# Altium PCB PCB1.PcbDoc
Units mm, origin at the board's own origin, x right, y up, seen from the top; angles counter-clockwise.
Board outline 80.26 x 80.39 mm, 2 copper layers (Top Layer, Bottom Layer); 11 components, 7 nets, 40 pads, 0 vias.
Unrouted connection lines stored in the file: 1.
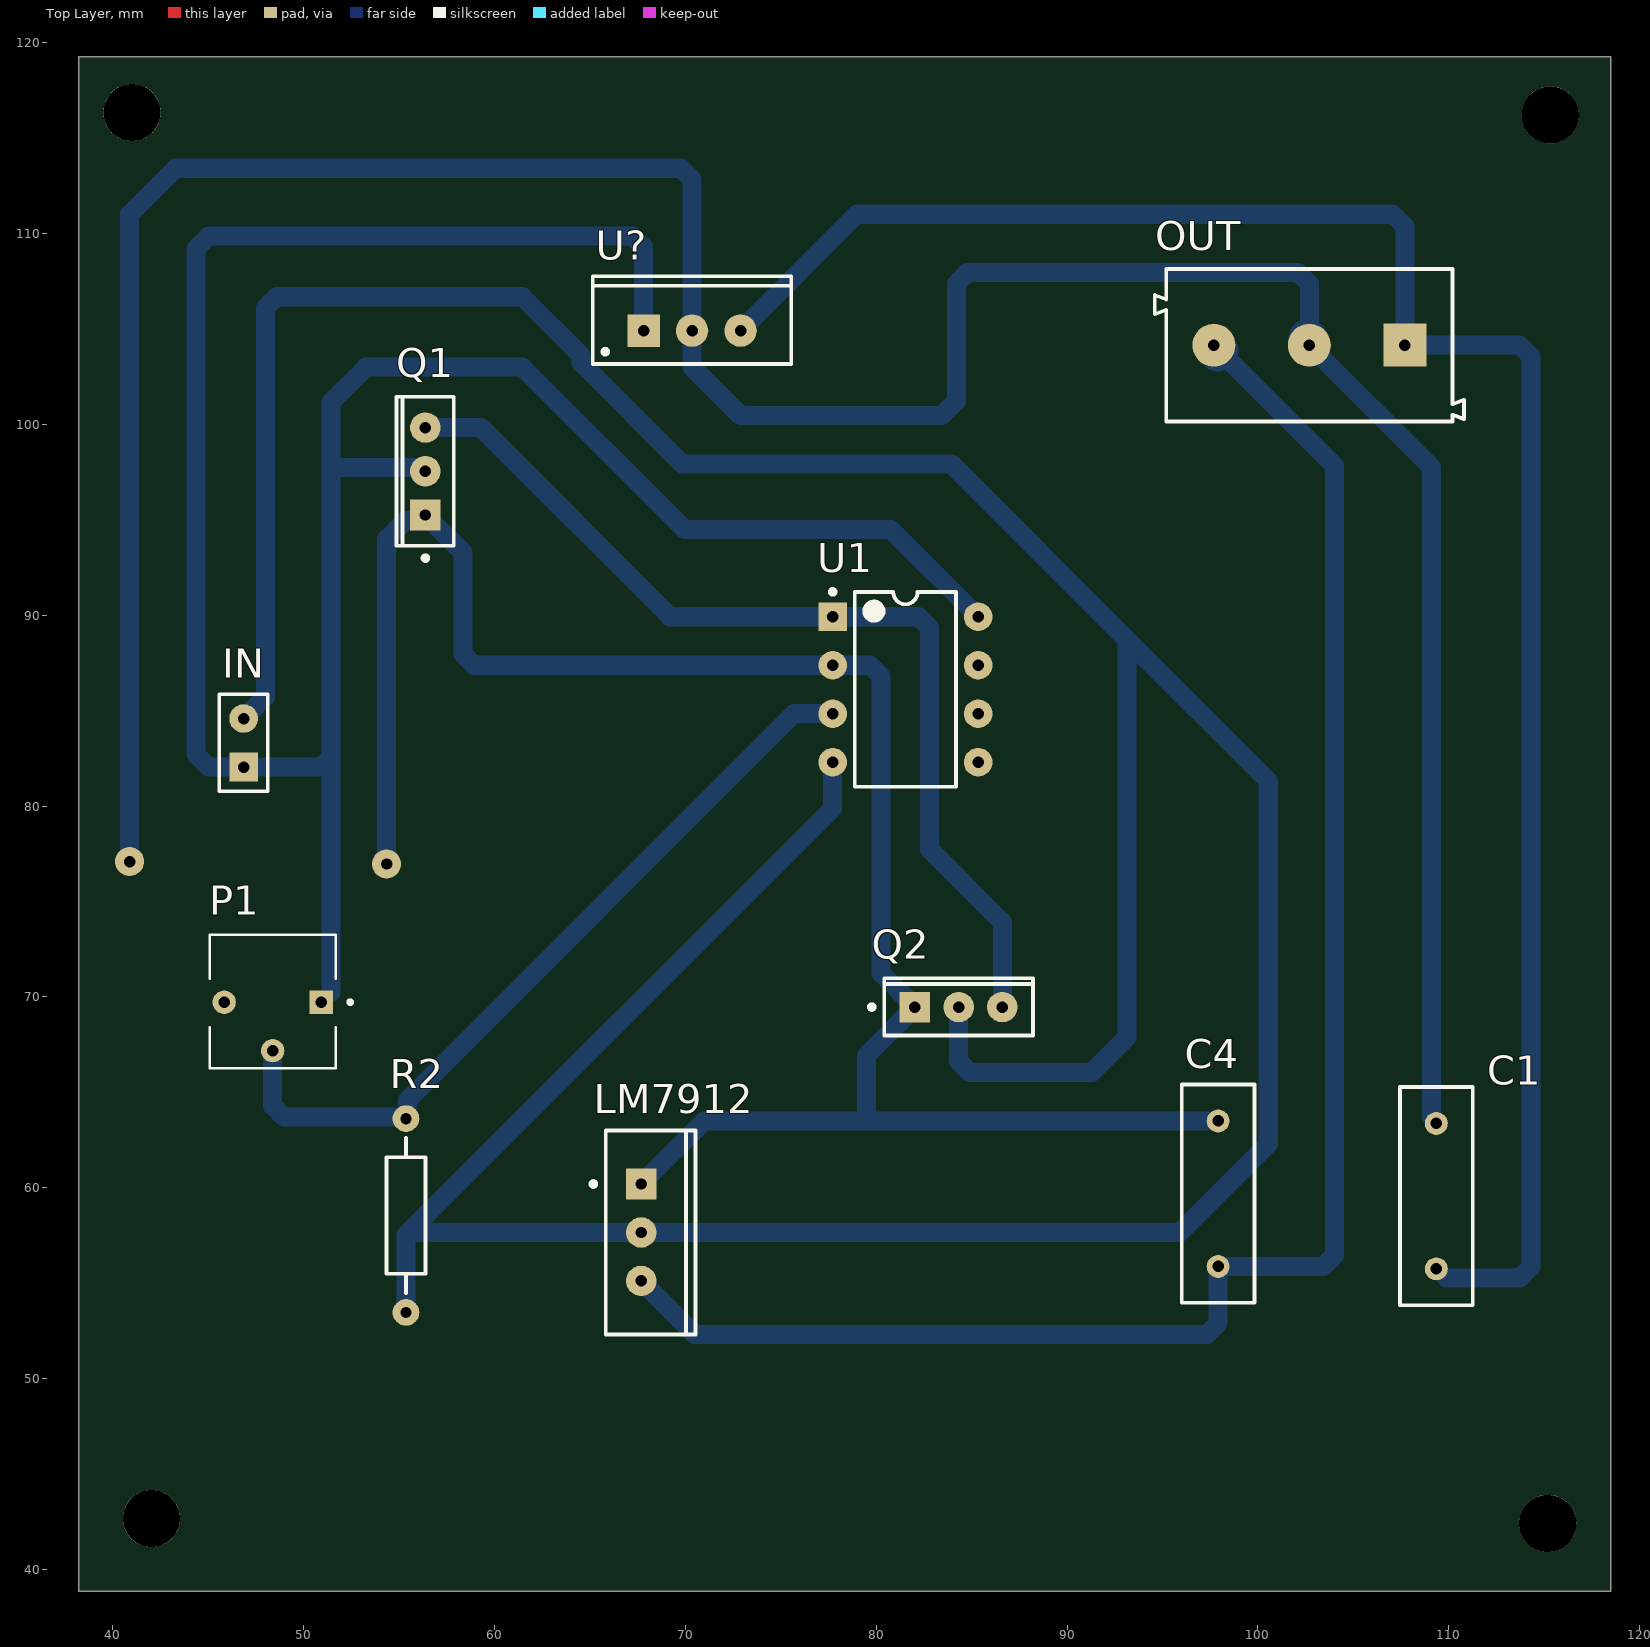
[diagram p0: Top Layer view]
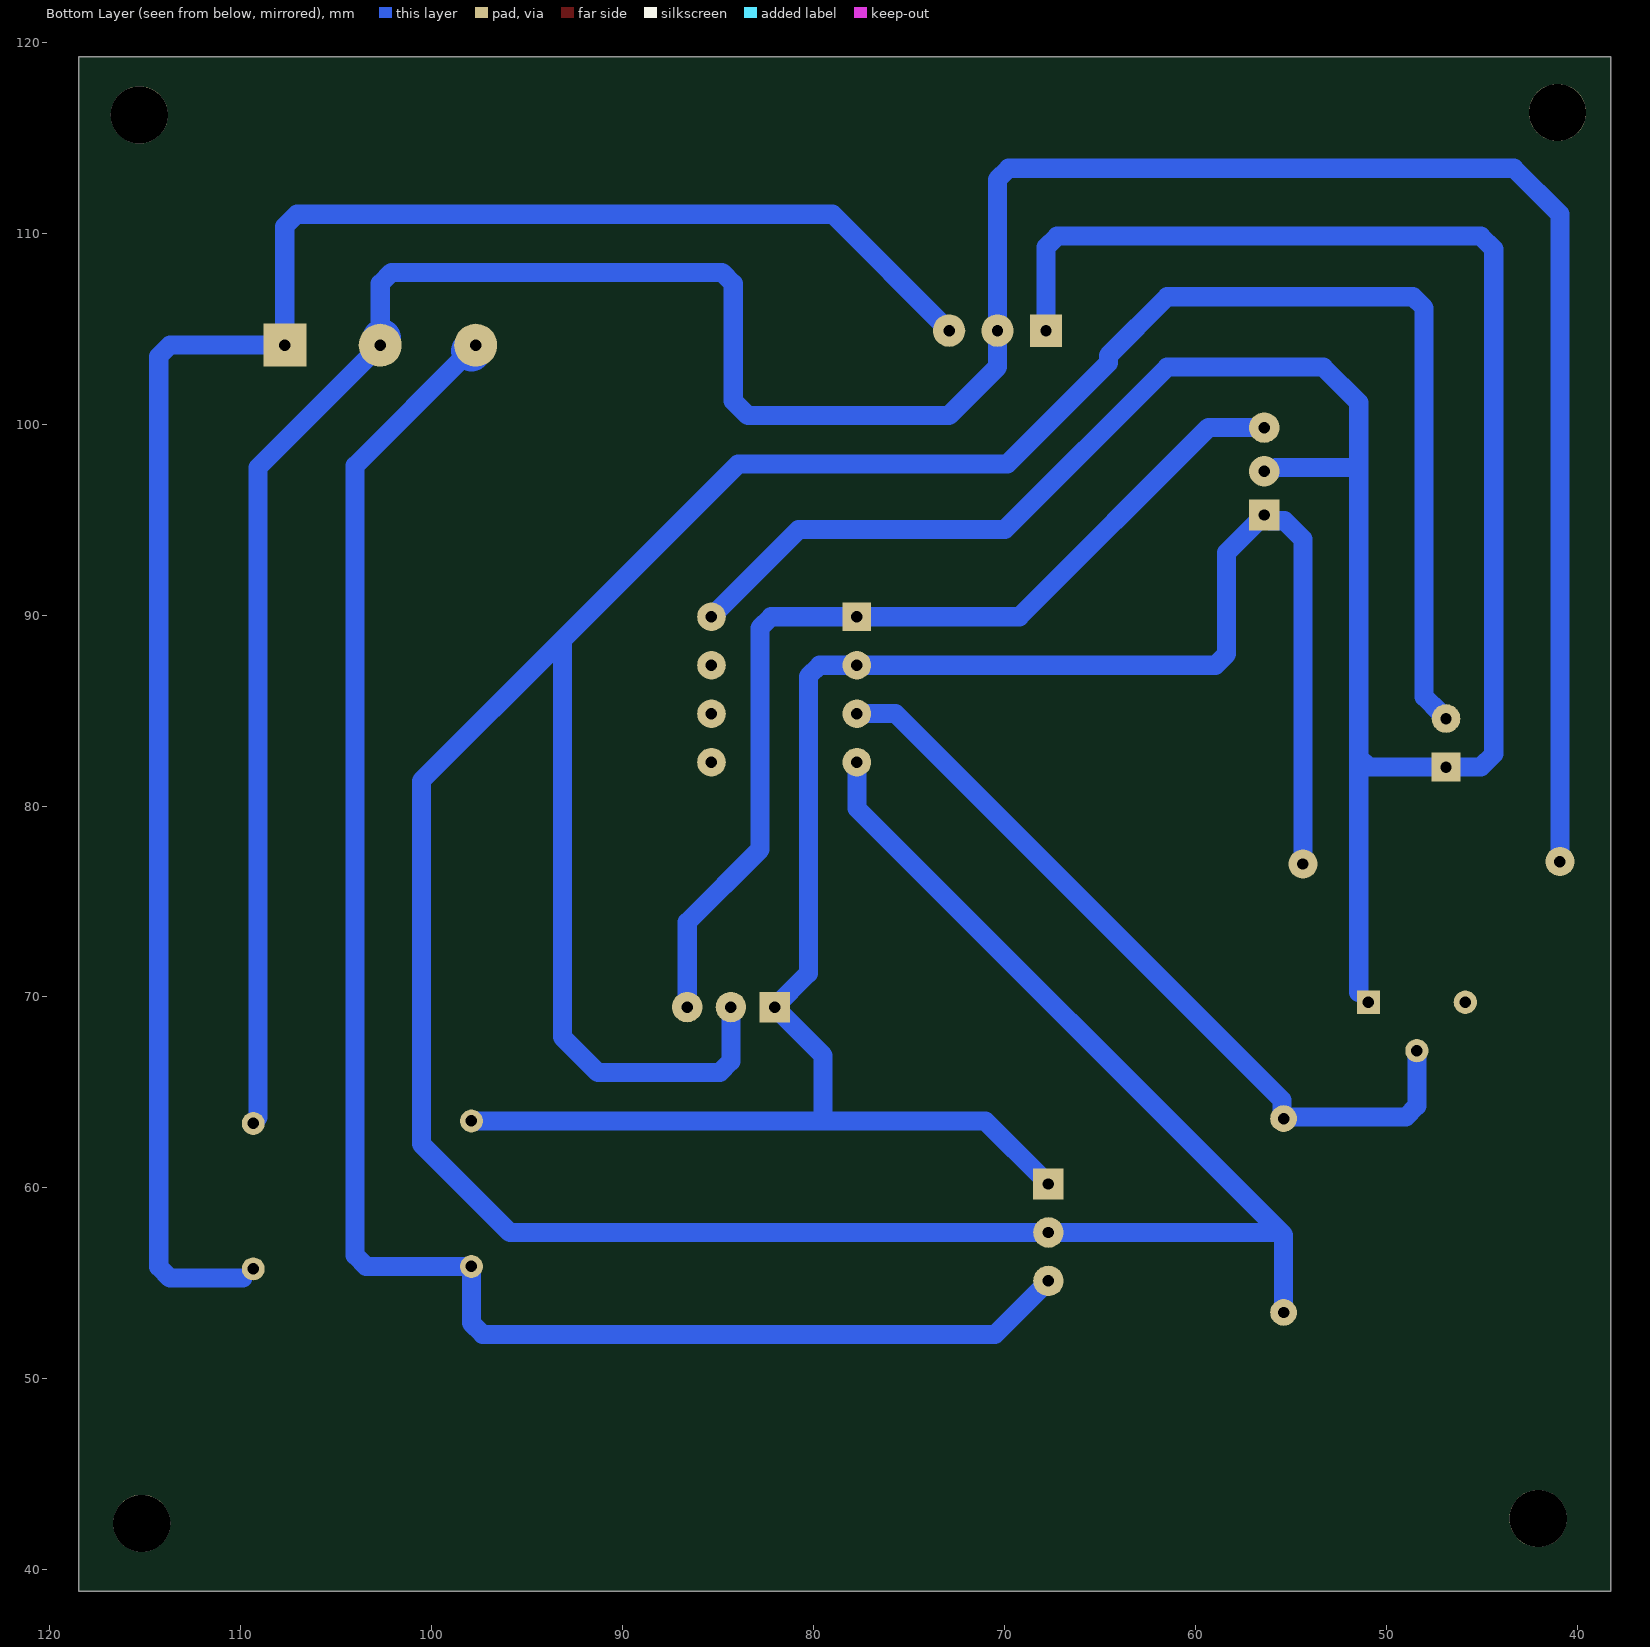
[diagram p1: Bottom Layer view, seen from below]

## Layer stack, top to bottom
Top Solder: solder mask 0.0102, Solder Resist, Dk 3.5
Top Layer: signal copper 0.0356
Dielectric 1: dielectric 0.32, FR-4, Dk 4.8
Bottom Layer: signal copper 0.0356
Bottom Solder: solder mask 0.0102, Solder Resist, Dk 3.5

## Board outline
38.227,38.862 118.491,38.862 118.491,119.253 38.227,119.253

## Design rules (kind name [scope] priority, off if disabled: settings)
Clearance [All] p1: gap=1 ignorepadtopadclearanceinfootprint=TRUE
PolygonConnect [All] p1: connectstyle=Relief reliefconductorwidth=0.254 reliefentries=4 polygonreliefangle="90 Angle" airgapwidth=0.254
RoomDefinition schemetic [InComponentClass('schemetic')] p1: confinementstyle=ConfineIn formatcopy=TRUE lockcomponents=FALSE outline 38.222,39.247 118.222,39.247 118.222,119.247 38.222,119.247
RoutingLayers [All] p1: top layer_v5=FALSE bottom layer_v5=TRUE
RoutingVias [All] p1: holewidth=0.711 width=1.27 viastyle="Through Hole" minholewidth=0.711 minwidth=1.27 maxholewidth=0.711 maxwidth=1.27
SolderMaskExpansion [All] p1: expansion=0.102 istentingtop=FALSE
Width [All] p1: maxlimit=2 minlimit=1 preferedwidth=2
29 further rules are at their usual default settings.

## Components (designator, comment, footprint, x,y, rotation, side; value= is the part's Value field where it differs from the comment)
C1 "Cap" RAD-0.3 109.347,59.563 r270 top value=1uF
C4 "Cap" RAD-0.3 97.917,59.69 r90 top value=1uF
IN "Header 2" HDR1X2 46.863,82.042 r90 top
LM7912 "LM7912CT" NDE0003A 67.691,57.658 r270 top
OUT "691111710003" 691111710003 102.696,104.14 r180 top
P1 "100k pot" TRIM_3362P-1-253LF 48.387,69.723 r180 top
Q1 "BD139" ONSC-TO-225-3-77-09 56.388,97.536 r180 top
Q2 "BD140" ONSC-TO-225-3-77-09 84.324,69.469 r90 top
R2 "100k" AXIAL-0.4 55.372,58.547 r90 top value=1K
U1 "TL072CP" P0008A 81.534,86.106 r0 top
U? "L78M12CV" TO220 70.358,104.902 r0 top

## Footprints (in the part's own frame and the unit in brackets; to place one, negate y for a bottom-side part, rotate by r counter-clockwise, add the part's x,y. Pads: shape width x height; smd on the part's side, far side on the other; paste and mask are expansions set on the pad)
691111710003 [mm] "5,00mm - modular - green - Horizontal entry with pressure clamp - 10,0mm height - 03p"
  rect 2.25x2.25 hole 0.6: 1(-5,0)
  round 2.25 hole 0.6: 2(0,0) 3(5,0)
  silkscreen extent -8.1,-4 8.1,4, body extent -8.1,-4 8.1,4, height 11.05
AXIAL-0.4 [mm] "Axial Device, Thru-Hole; 2 Leads; 0.4 in Pin Spacing"
  round 1.4 hole 0.6: 1(-5.08,0) 2(5.08,0)
  silkscreen extent -4.06,-1.02 4.06,1.02
HDR1X2 [mm] "Connector; Header; 2 Position"
  rect 1.5x1.5 hole 0.6: 1(0,0)
  round 1.5 hole 0.6: 2(2.54,0)
  silkscreen extent -1.27,-1.27 3.81,1.27
NDE0003A [mm] "FM, 3-Leads, Body 10.7x4.7mm, Pitch 2.54mm"
  rect 1.6x1.6 hole 0.6: 1(-2.54,0)
  round 1.6 hole 0.6: 2(0,0) 3(2.54,0)
  silkscreen extent -5.35,-2.62 5.35,2.85, body extent -5.4,-1.9 5.4,2.9, height 19.4
ONSC-TO-225-3-77-09 [mm] "FM, 3-Leads, Body 7.8x3mm, Pitch 2.29mm"
  rect 1.6x1.6 hole 0.6: 1(0,2.29)
  round 1.6 hole 0.6: 2(0,0) 3(0,-2.29)
  silkscreen extent -1.49,-3.9 1.51,4.67, body extent -1.49,-3.9 1.51,3.9, height 13.64
P0008A [mm] "DIP, 8-Leads, Body 10.15x6.6mm, Pitch 2.54mm"
  rect 1.5x1.5 hole 0.6: 1(-3.81,3.81)
  round 1.5 hole 0.6: 2(-3.81,1.27) 3(-3.81,-1.27) 4(-3.81,-3.81) 5(3.81,-3.81) 6(3.81,-1.27) 7(3.81,1.27) 8(3.81,3.81)
  silkscreen extent -3.93,-5.1 2.65,5.23, body extent -3.95,-5.07 3.95,5.07, height 5.08
RAD-0.3 [mm] "Radial Cap, Thru-Hole; 2 Leads; 0.3 in Pin Spacing"
  round 1.2 hole 0.6: 1(-3.81,0) 2(3.81,0)
  silkscreen extent -5.71,-1.91 5.71,1.91
TO220 [mm] "TO, Thru-Hole, Vertical, Heatsink Mounted; 3 In-Line Leads; Pitch 2.54 mm"
  rect 1.7x1.7 hole 0.6: 1(-2.54,0)
  round 1.7 hole 0.6: 2(0,0) 3(2.54,0)
  silkscreen extent -5.2,-1.75 5.2,2.85, body extent -5.25,-1.8 5.25,2.9, height 19.7
TRIM_3362P-1-253LF [mm]
  rect 1.222x1.222 hole 0.6: 1(-2.54,0)
  round 1.222 hole 0.6: 2(0,2.54) 3(2.54,0)
  silkscreen extent -4.16,-3.53 3.3,3.47, body extent -1.55,-0.8 1.55,0.8, height 0.65

## Part data
C1 C4: "Capacitor", LatestRevisionDate=17-Jul-2002, LatestRevisionNote="Re-released for DXP Platform.", PackageDescription="Radial Cap, Thru-Hole; 2 Leads; 0.3 in Pin Spacing", PackageReference=RAD-0.3, Published=8-Jun-2000, Publisher="Altium Limited"
IN: "Header, 2-Pin", LatestRevisionDate=17-Jul-2002, LatestRevisionNote="Re-released for DXP Platform.", Publisher="Altium Limited"
LM7912: library part CMP-0062-02472-3, "3-Terminal Negative Regulator, 3-pin TO-220", Manufacturer="Texas Instruments", PackageTopMarking=NSUZXYTTE#*LM7912CT, PowerWise=N, ComponentLink1Description="Datasheet URL", ComponentLink1URL=http://www.ti.com/general/docs/lit/getliterature.tsp?genericPartNumber=LM7912&fileType=pdf, CompType="LDO IC", PackageDescription="TO-220, Molded, 3 Lead, Straight", PackageReference=NDE0003A, PinCount=3, RoHS=N
OUT: library part CMP-1502-03263-1, "Series 111 - 5.00 mm Horizontal Entry Modular with Pressure Clamp WR-TBL, 3 pin", Manufacturer="Wurth Elektronik", Operating Temperature=-40to105degC, Datasheet URL=http://katalog.we-online.de/em/datasheet/6911117100xx.pdf, Manufacturer URL=http://www.we-online.de, Mounting Technology=THT, Package Reference=691111710003, Packaging=Box, Part Number=691111710003, Pin Number=3, Pitch=5.00mm, Publisher=WurthElektronik
P1: library part 3362P-1-253LF, "25 kOhms 0.5W, 1/2W PC Pins Through Hole Trimmer Potentiometer Cermet 1 Turn Top Adjustment", Package="3116 Bourns", Availability=Good, Check_prices=https://www.snapeda.com/parts/3362P-1-253LF/Bourns/view-part/493663/?ref=eda, MF=Bourns, MP=3362P-1-253LF, Price=None, Purchase-URL=https://pricing.snapeda.com/search/part/3362P-1-253LF/?ref=eda, SnapEDA_Link=https://www.snapeda.com/parts/3362P-1-253LF/Bourns/view-part/493663/?ref=snap
Q1: library part CMP-1048-01271-1, "Plastic Medium-Power Silicon NPN Transistor, 3-Pin TO-225, Bulk Box", Manufacturer="On Semiconductor", ComponentLink1Description="Manufacturer URL", ComponentLink1URL=http://www.onsemi.com/, ComponentLink2Description=Datasheet, ComponentLink2URL=http://www.onsemi.com/pub_link/Collateral/BD135-D.PDF, ComponentLink3Description="Package Specification", ComponentLink3URL=http://www.onsemi.com/pub_link/Collateral/77-09.PDF, DatasheetVersion="Rev. 16", IC Continuous (A)=1.5, Mounting Technology="Through Hole", PackageDescription="3-Pin Flange Mount, Vertical Straight Lead, Body 7.6 x 2.7 mm, Pitch 2.29 mm", PackageReference=TO-225-3-77-09, PackageVersion="Rev. AC, 12/2013", Packing="Bulk Box", PartNumber=BD139, Polarity=NPN, RoHS=FALSE
Q2: library part CMP-1048-00039-1, "Plastic Medium-Power Silicon PNP Transistor, 3-Pin TO-225, Bulk Box", Manufacturer="On Semiconductor", ComponentLink1Description="Manufacturer URL", ComponentLink1URL=http://www.onsemi.com/, ComponentLink2Description=Datasheet, ComponentLink2URL=http://www.onsemi.com/pub_link/Collateral/BD136-D.PDF, ComponentLink3Description="Package Specification", ComponentLink3URL=http://www.onsemi.com/pub_link/Collateral/77-09.PDF, DatasheetVersion="Rev. 15", IC Continuous (A)=1.5, Mounting Technology="Through Hole", PackageDescription="3-Pin Flange Mount, Vertical Straight Lead, Body 7.6 x 2.7 mm, Pitch 2.29 mm", PackageReference=TO-225-3-77-09, PackageVersion="Rev. AC, 12/2013", Packing="Bulk Box", PartNumber=BD140, Polarity=PNP, RoHS=FALSE
R2: library part Res2, "Resistor", LatestRevisionDate=17-Jul-2002, LatestRevisionNote="Re-released for DXP Platform.", PackageDescription="Axial Device, Thru-Hole; 2 Leads; 0.4 in Pin Spacing", PackageReference=AXIAL-0.4, Published=8-Jun-2000, Publisher="Altium Limited"
U1: library part CMP-0017-00950-2, "Dual Low-Noise JFET-Input General-Purpose Operational Amplifier, 7 to 36 V, 0 to 70 degC, 8-pin DIP (P8), Pb-Free (RoHS)", Manufacturer="Texas Instruments", Rating=Catalog, Total Supply Voltage(Max)(+5V is 5, +/-5V is 10)=36, Total Supply Voltage(Min)(+5V is 5, +/-5V is 10)=7, CMRR(Min)(dB)=70, Code_JEDEC=MS-001, ComponentLink1Description="Manufacturer URL", ComponentLink1URL=http://www.ti.com/, ComponentLink2Description=Datasheet, ComponentLink2URL=http://www.ti.com/lit/ds/symlink/tl072.pdf, ComponentLink3Description="Package Specification", ComponentLink3URL=http://www.ti.com/litv/pdf/mpdi001b, DatasheetVersion=SLOS080J, Eco-Plan="Pb-Free (RoHS)", GBW(Typ)(MHz)=3, IIB(Max)(pA)=200, Iq per channel(Max)(mA)=2.5, Mounting Technology="Through Hole", Number of Channels=2, Offset Drift(Typ)(uV/C)=18, PackageDescription="8-Pin Plastic In-Line, Body 9.59 x 6.35 mm, Pitch 2.54 mm", PackageReference=P0008A, PackageVersion="4040082/E, 04/2010", PartNumber=TL072CP, Slew Rate(Typ)(V/us)=13, Sub Family="General Purpose Amplifier, High Supply Voltage Amplifier (>=30V)", Vio (25C)(Max)(mV)=10, Vn at 1kHz(Typ)(nV/rtHz)=18
U?: library part CMP-0244-00415-1, "Positive Voltage Regulator, 12V, 3-Pin TO-220", ComponentLink1Description="Manufacturer URL", ComponentLink1URL=http://www.st.com, ComponentLink2Description=Datasheet, ComponentLink2URL=http://www.st.com/internet/com/TECHNICAL_RESOURCES/TECHNICAL_LITERATURE/DATASHEET/CD00000447.pdf, ComponentLink3Description="Package Specification", ComponentLink3URL=http://www.st.com/internet/com/TECHNICAL_RESOURCES/TECHNICAL_LITERATURE/PACKAGE_INFORMATION/CD00004649.pdf, DatasheetVersion=1/11/2010, PackageDescription="TO, Thru-Hole, Vertical, Heatsink Mounted; 3 In-Line Leads; Pitch 2.54 mm", PackageReference=TO220, PackageVersion=ver3.0

## Free pads (board coordinates)
  round 1.524 hole 0.6: 5(40.894,77.089) 6(54.356,76.962)
  round 3 hole 3 unplated: 7(41.021,116.332) 7(42.037,42.672) 7(115.189,42.418) 7(115.316,116.205)

## Nets (pads, with @x,y where several pads share a name; then routed paths per layer and width w, separated by ;. In a path a pad name is that pad's centre, name@x,y a point inside that pad or via, vN(x,y) a via of type N, cw(c..) or ccw(c..) an arc to the next point about the centre after c; other vN are vias at no path point)
GND: P1.2 R2.2 U1.3 | length 41.6
  Bottom Layer w1: P1.2@48.387,67.123 48.387,64.289 48.973,63.704 R2.2@55.372,63.704 ; R2.2@55.449,63.704 55.449,64.593 75.692,84.836 U1.3
NetC1_1: C1.1 C4.2 LM7912.1 OUT.2 pad.5 pad.6 Q1.1 Q2.1 U1.2 U?.2 | length 267.5
  Bottom Layer w1: pad.5 40.894,110.998 43.307,113.411 69.772,113.411 70.358,112.825 U?.2 70.358,102.997 72.898,100.457 83.439,100.457 84.201,101.219 84.201,107.364 84.787,107.95 102.11,107.95 102.696,107.364 OUT.2@102.696,104.521 ; pad.6@54.356,77.47 54.356,93.98 55.322,94.946 56.088,94.946 Q1.1 58.355,93.278 58.355,87.962 58.941,87.376 U1.2 79.678,87.376 80.264,86.79 80.264,71.239 Q2.1 79.502,66.937 79.502,63.5 ; LM7912.1@67.882,60.389 70.993,63.5 79.502,63.5 ; C4.2 79.502,63.5 ; OUT.2 109.093,97.743 109.093,63.681 109.347,63.427 C1.1@109.347,63.4
  Bottom Layer w2: OUT.2@102.616,104.521 102.616,104.22 OUT.2
NetC1_2: C1.2 OUT.1 U?.3 | length 102.9
  Bottom Layer w1: U?.3@72.962,104.965 78.994,110.998 107.061,110.998 107.696,110.363 OUT.1 113.714,104.14 114.3,103.554 114.3,55.862 113.714,55.276 109.878,55.276
NetC4_1: C4.1 LM7912.3 OUT.3 | length 91
  Bottom Layer w1: LM7912.3@67.945,54.864 70.485,52.324 97.331,52.324 97.917,52.91 C4.1 103.427,55.88 104.013,56.466 104.013,97.823 97.997,103.839 OUT.3
  Bottom Layer w2: OUT.3@97.917,103.759 OUT.3@97.997,103.839
NetIN_1: IN.1 P1.1 Q1.2 U1.8 U?.1 | length 138.4
  Bottom Layer w1: P1.1@51.435,70.231 51.435,82.55 ; Q1.2 56.273,97.651 55.849,97.651 55.774,97.726 51.435,97.726 ; U?.1 67.818,109.269 67.232,109.855 45.036,109.855 44.363,109.182 44.363,82.715 45.036,82.042 50.927,82.042 51.435,82.55 ; U1.8 80.772,94.488 69.977,94.488 61.471,102.994 53.291,102.994 51.435,101.138 51.435,97.726 ; 51.435,82.55 51.435,97.726
NetIN_2: IN.2 LM7912.2 Q2.2 R2.1 U1.4 | length 222.3
  Bottom Layer w1: IN.2@47.18,84.9 48.006,85.725 48.006,106.094 48.592,106.68 61.468,106.68 64.548,103.6 64.548,103.219 69.85,97.917 83.947,97.917 93.147,88.717 ; R2.1 55.372,57.531 55.499,57.658 ; LM7912.2 55.499,57.658 ; LM7912.2@67.691,57.698 67.928,57.698 67.968,57.658 95.905,57.658 100.544,62.297 100.544,81.32 93.147,88.717 ; U1.4@77.724,81.915 77.724,79.883 55.499,57.658 ; Q2.2 84.324,66.626 84.91,66.04 91.298,66.04 93.147,67.889 93.147,88.717
NetQ1_3: Q1.3 Q2.3 U1.1 | length 52.2
  Bottom Layer w1: Q1.3 59.305,99.826 69.215,89.916 U1.1 82.218,89.916 82.804,89.33 82.804,77.724 86.614,73.914 Q2.3
pads on no net: P1.3 U1.5 U1.6 U1.7